# Altium PCB gps_imu.PcbDoc
Units mm, origin at the board's own origin, x right, y up, seen from the top; angles counter-clockwise.
Board outline 91.75 x 111 mm, 4 copper layers (Top Layer, GND, PWR, Bottom Layer), stack 0.778 mm thick; 42 components, 27 nets, 181 pads, 8 vias.
Unrouted connection lines stored in the file: 70.
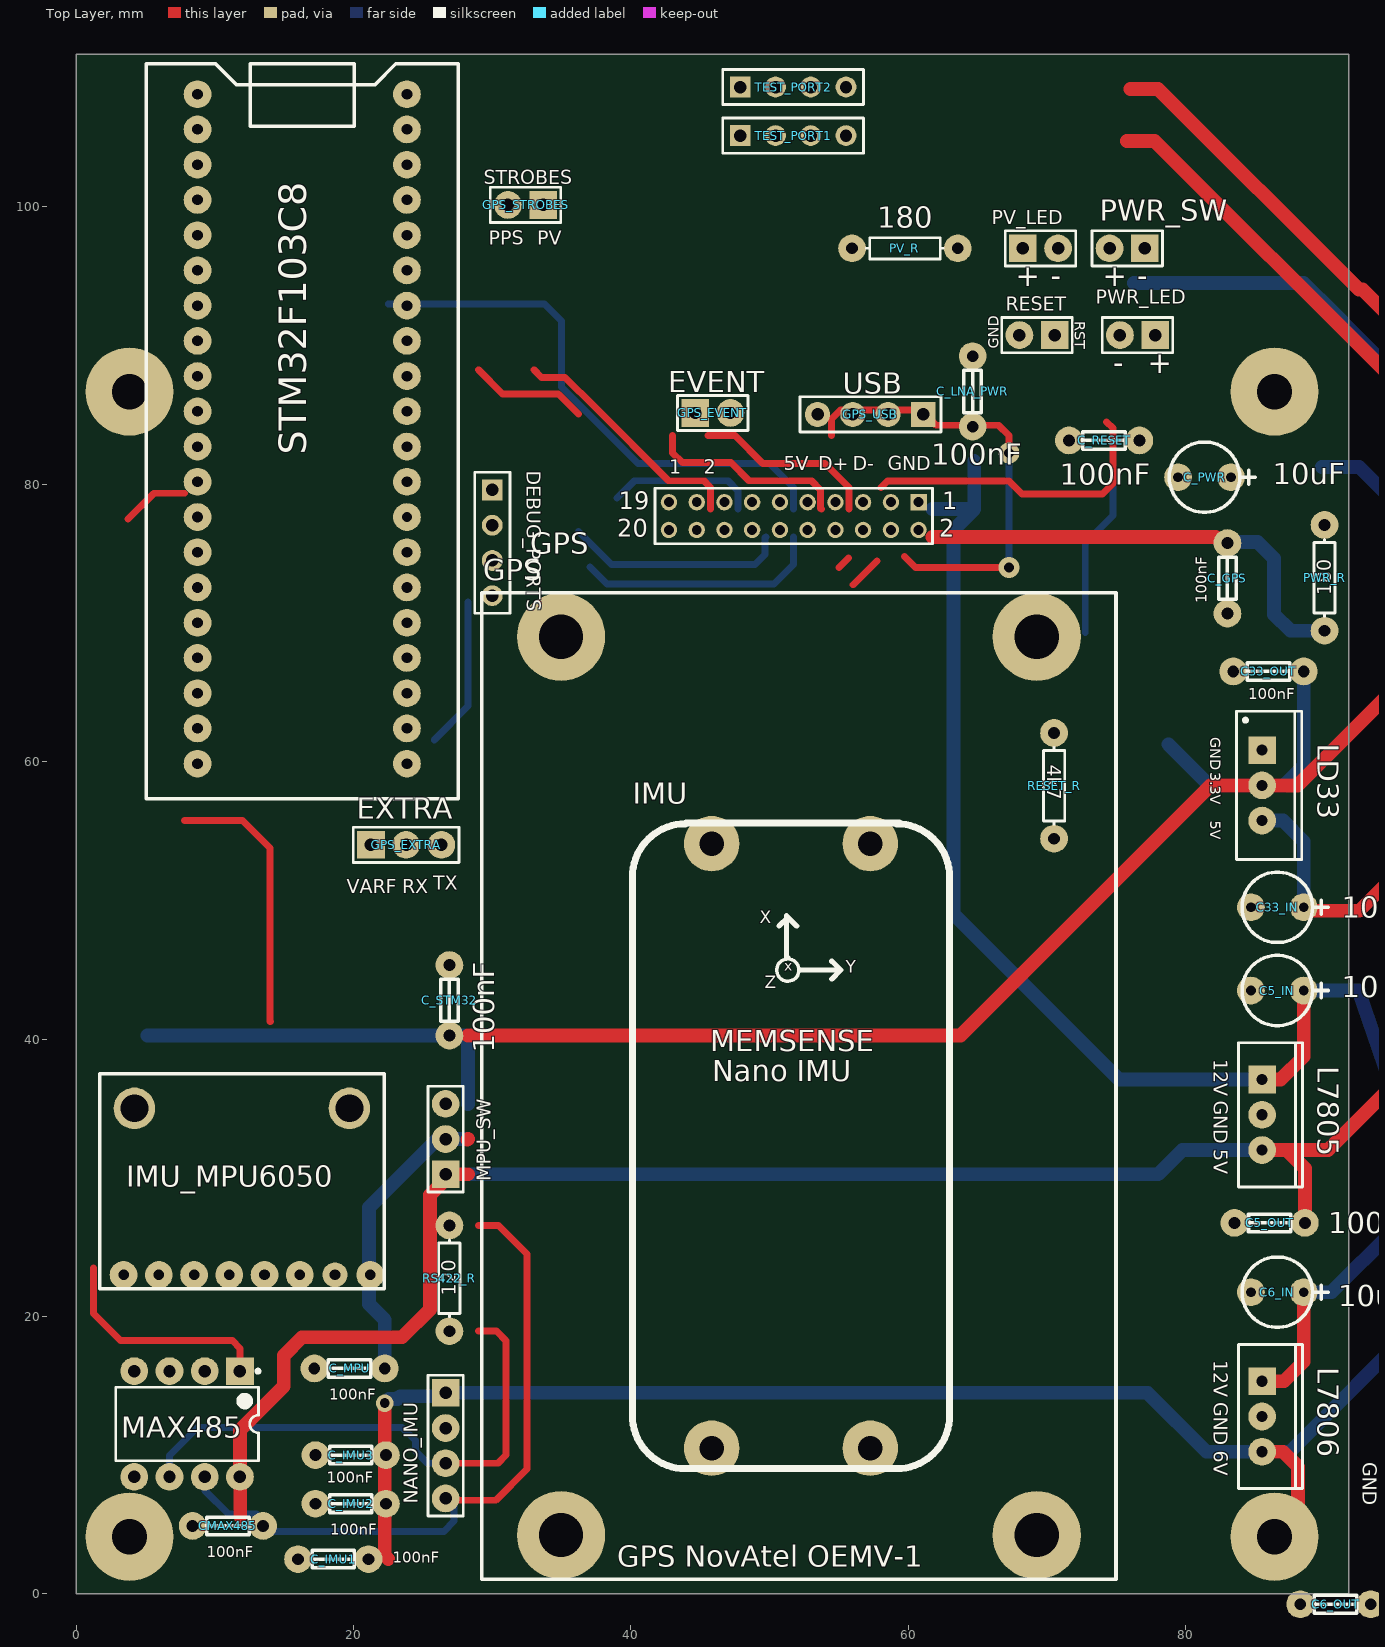
[diagram p0: Top Layer view]
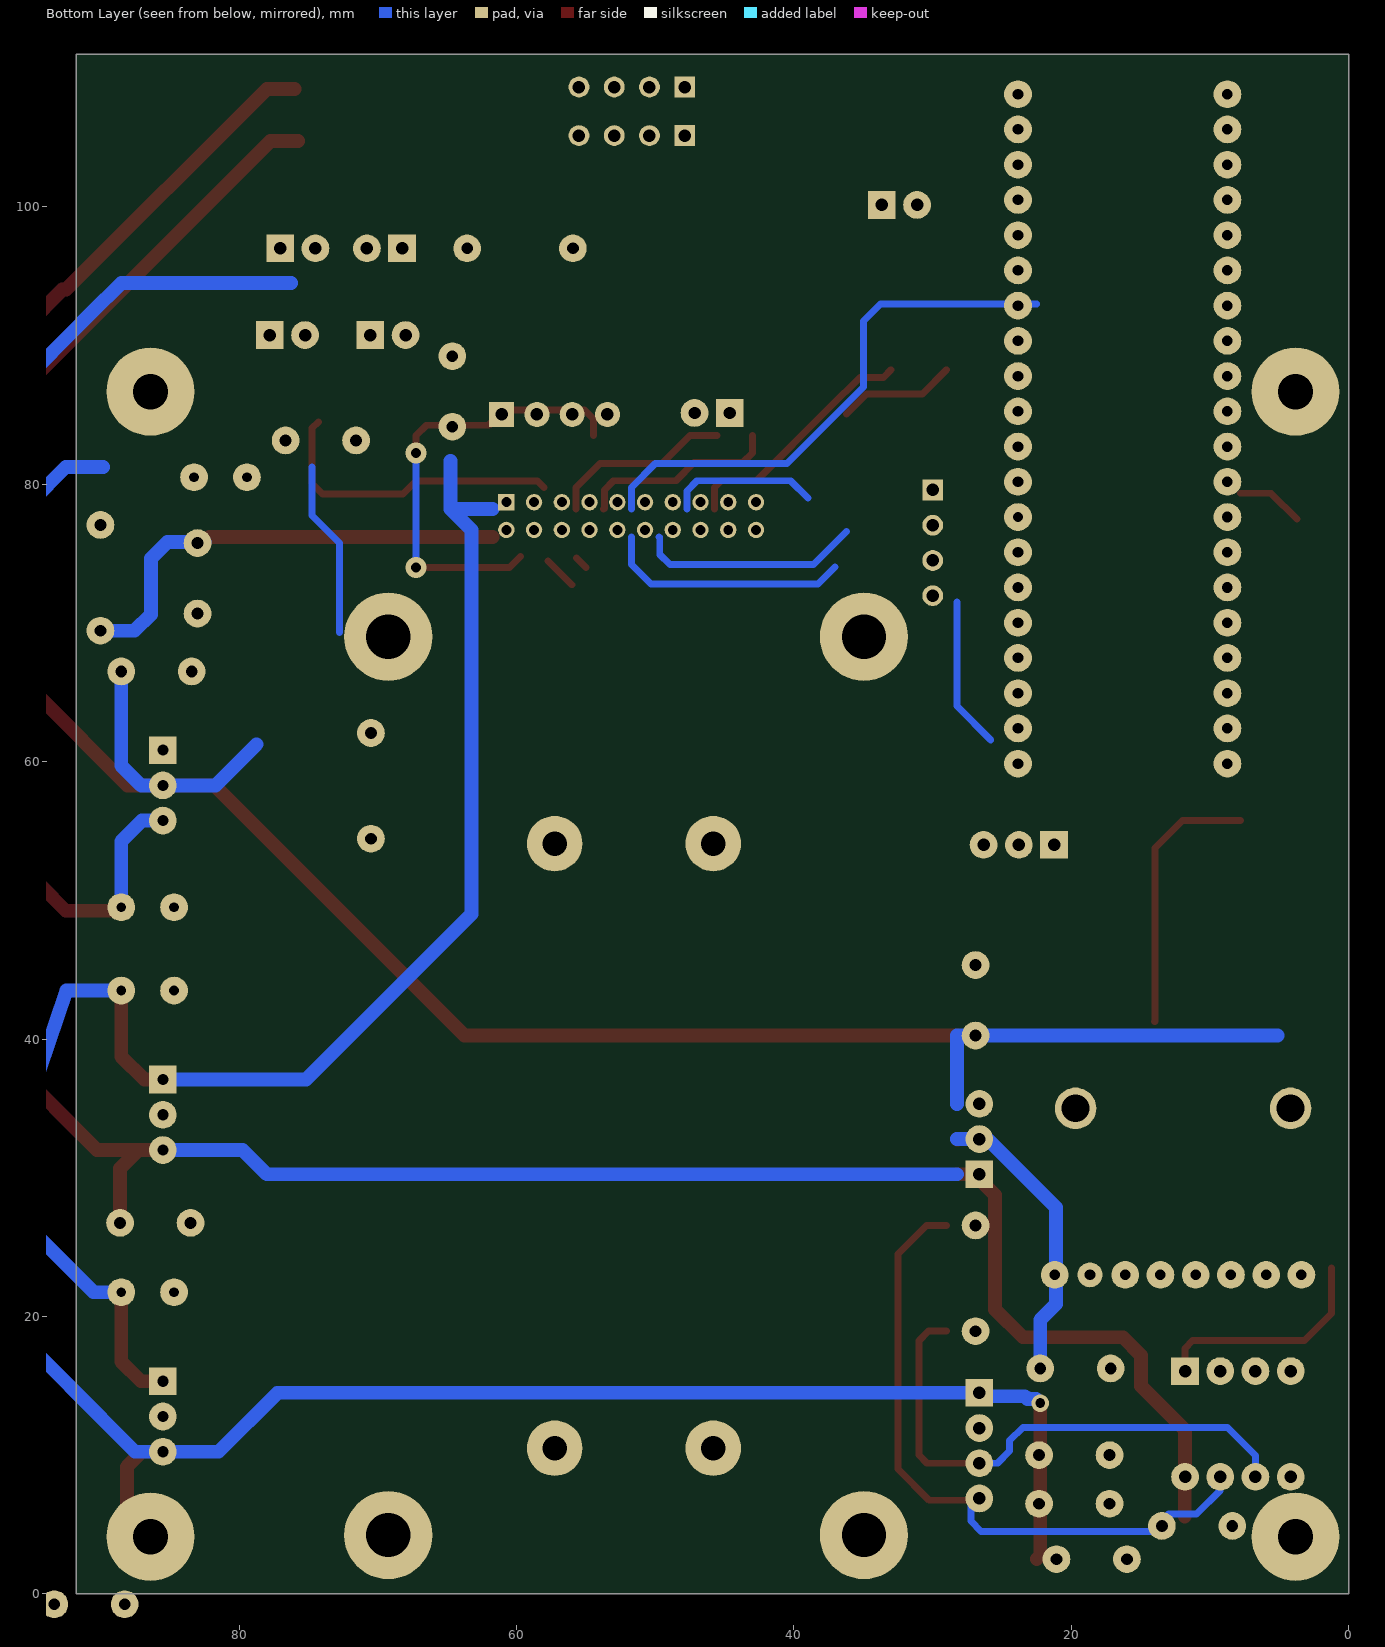
[diagram p1: Bottom Layer view, seen from below]
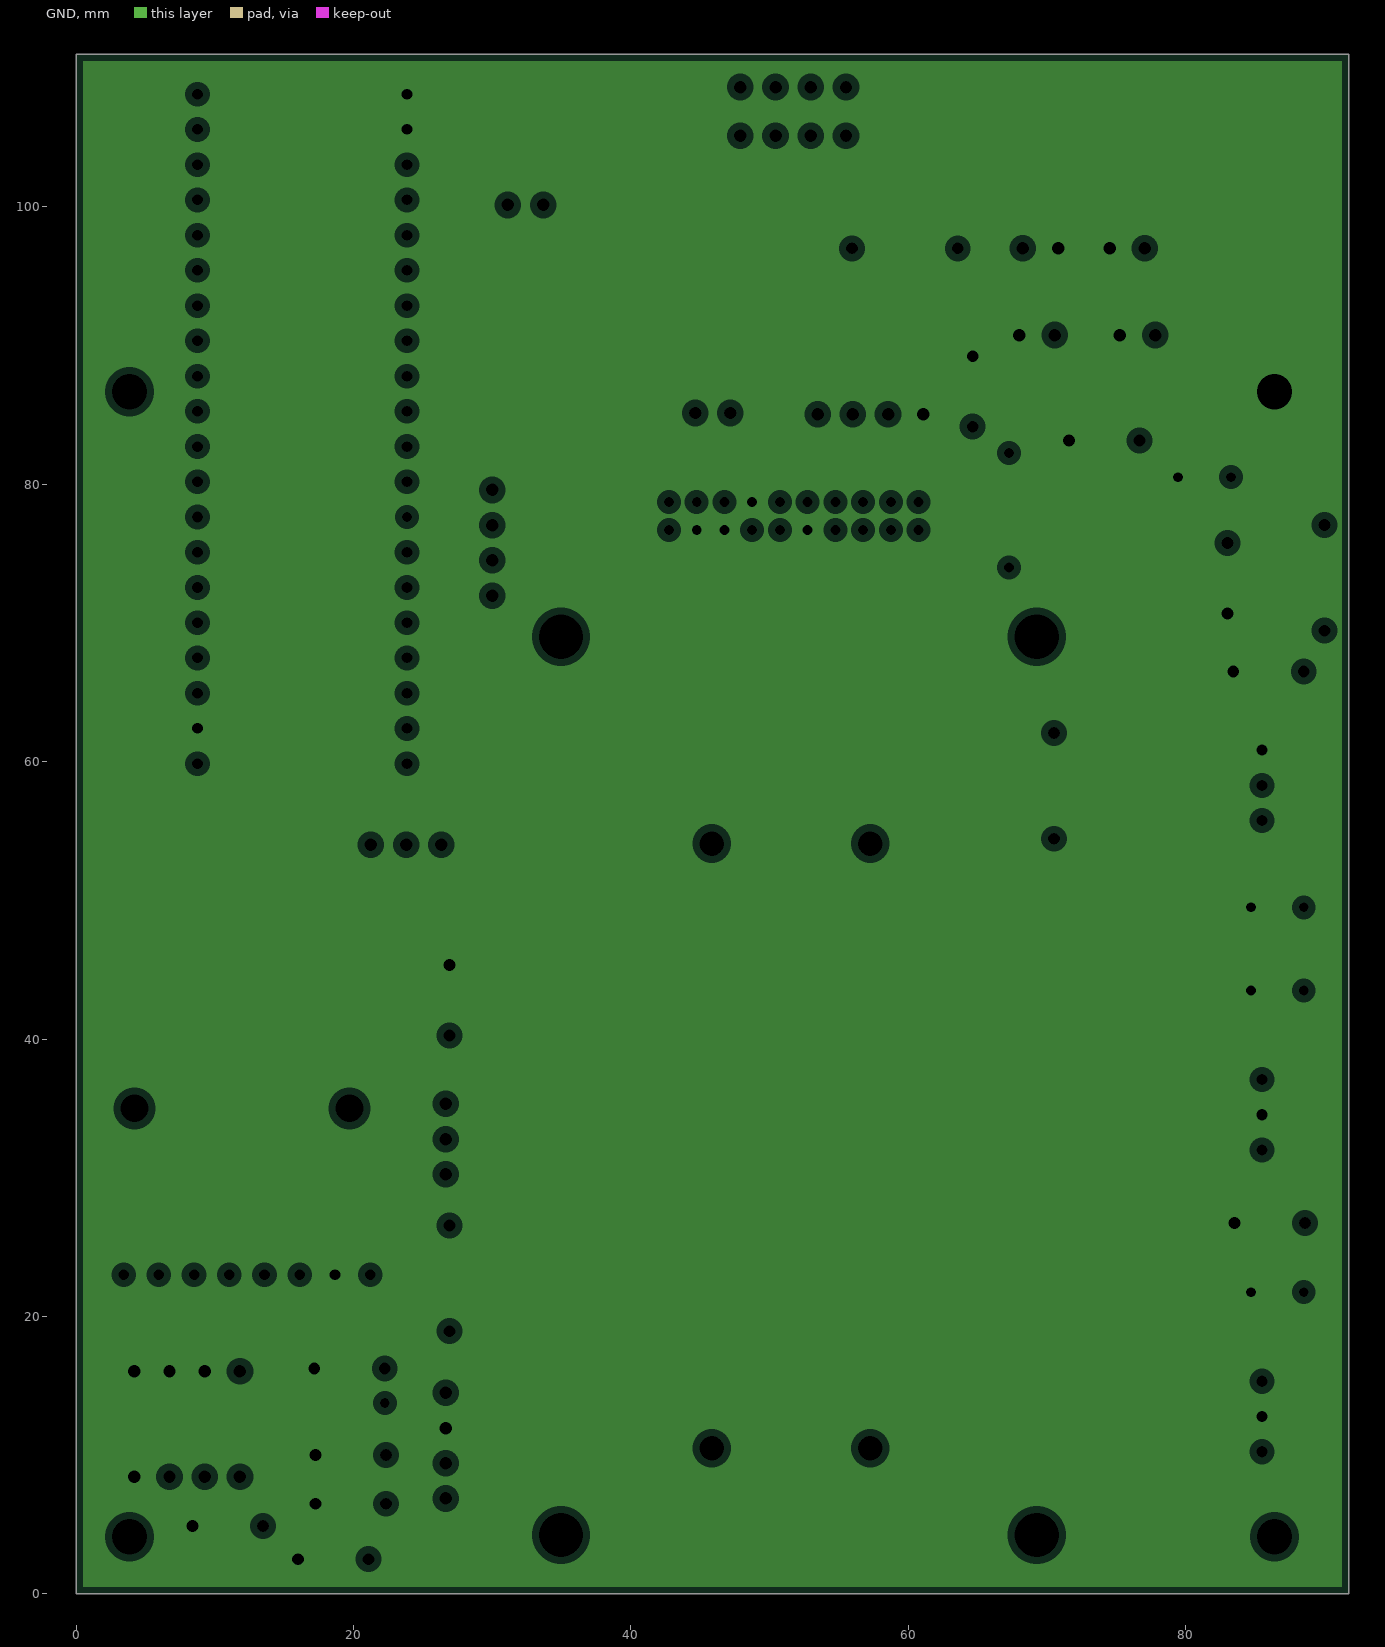
[diagram p2: GND, clearances drawn from the general rule]
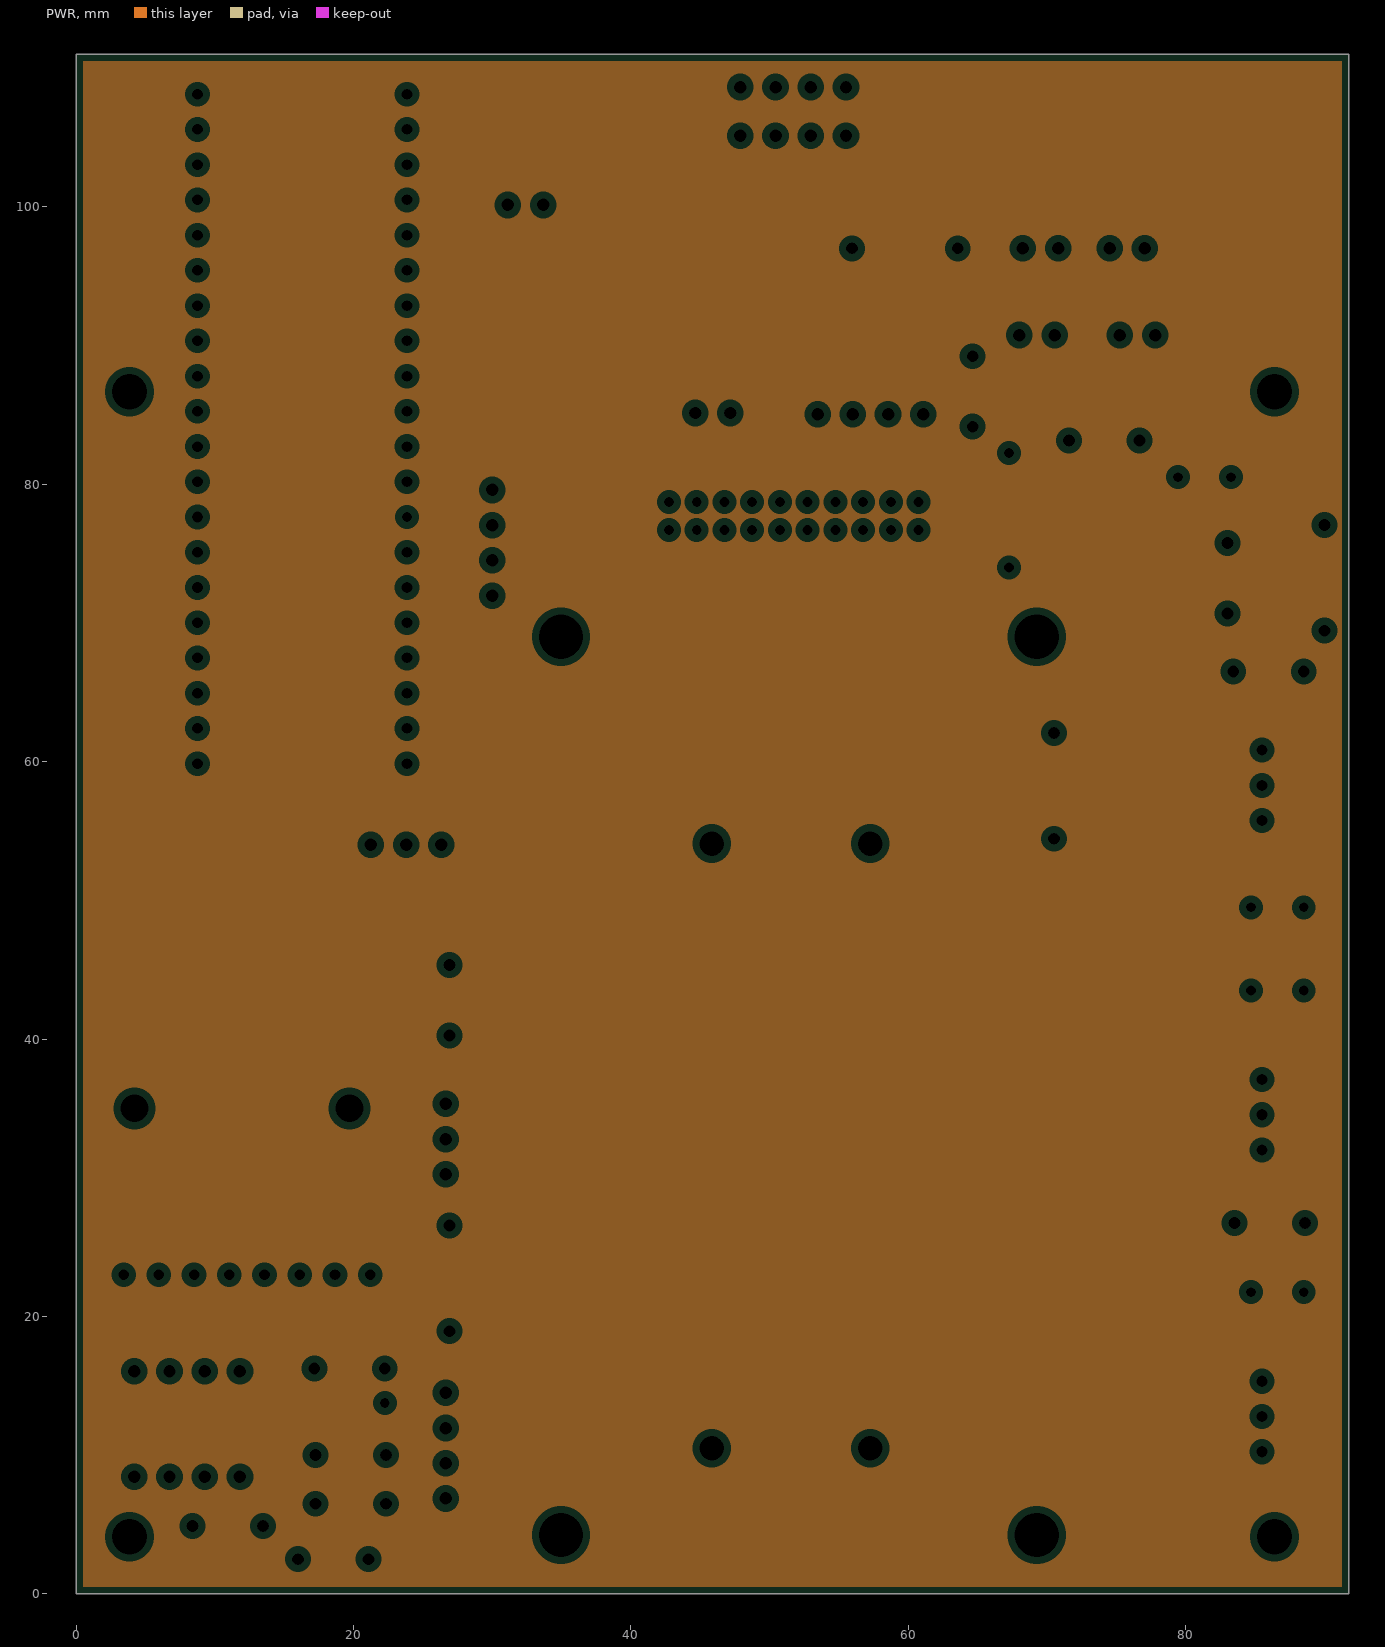
[diagram p3: PWR, clearances drawn from the general rule]

## Layer stack, top to bottom
Top Solder: solder mask 0.0102, Solder Resist, Dk 3.5
Top Layer: signal copper 0.0356
Dielectric 1: core 0.254, FR-4, Dk 4.2
GND: plane copper 0.036, net GND
Dielectric 3: prepreg 0.127, Dk 4.2
PWR: plane copper 0.036
Dielectric 2: core 0.254, Dk 4.2
Bottom Layer: signal copper 0.0356
Bottom Solder: solder mask 0.0102, Solder Resist, Dk 3.5

## Board outline
0,0 91.75,0 91.75,111 0,111

## Design rules (kind name [scope] priority, off if disabled: settings)
Clearance [All] p1: gap=0.7 ignorepadtopadclearanceinfootprint=TRUE
ComponentClearance [All] p1: gap=0.254 collisioncheckmode=3 verticalgap=2540 showdistances=FALSE
PlaneClearance [All] p1: clearance=0.508
PlaneConnect [All] p1: planeconnectstyle=Direct reliefexpansion=0.508 reliefentries=4 reliefconductorwidth=0.254 reliefairgap=0.254
PolygonConnect [All] p1: connectstyle=Direct reliefconductorwidth=0.254 reliefentries=4 polygonreliefangle="90 Angle" airgapwidth=0.254
RoomDefinition Sheet1 [InComponentClass('Sheet1')] p1: confinementstyle=ConfineOut formatcopy=TRUE lockcomponents=FALSE outline 114.25,16.75 558.249,16.75 558.249,97.75 114.25,97.75
RoutingVias [All] p1: holewidth=0.6 width=1.27 viastyle="Through Hole" minholewidth=0.6 minwidth=1.27 maxholewidth=2.8 maxwidth=2.8
ShortCircuit [All] p1: allowed=TRUE
SilkToSilkClearance [All] p1: silktosilkclearance=0
SolderMaskExpansion [All] p1: expansion=0.1
Width Width_Power [(InNet('3.3V') OR InNet('12V') OR InNet('6V') OR InNet('5V') OR InNet('GND') OR InNet('PWR_SW_2') OR InNet('MPU_VIN'))] p1: maxlimit=1 minlimit=1 preferedwidth=1
Width [All] p2: maxlimit=0.5 minlimit=0.5 preferedwidth=0.5
25 further rules are at their usual default settings.

## Classes and differential pairs
component class Sheet1: C5_IN C5_OUT C6_IN C6_OUT C33_IN C33_OUT C_GPS C_IMU1 C_IMU2 C_IMU3 C_LNA_PWR C_MPU C_PWR C_RESET C_STM32 CMAX485 DEBUG_PORTS GPS_EVENT GPS_EXTRA GPS_STROBES GPS_USB IMU_MPU6050 L7805 L7806 LD33 MAX485 MPU_SW NANO_IMU PV_LED PV_R PWR_LED PWR_R PWR_SW RESET RESET_R RS422_R STM32F103C8 TEST_PORT1 TEST_PORT2

## Components (designator, comment, footprint, x,y, rotation, side; value= is the part's Value field where it differs from the comment)
C5_IN "10uF" Capacitor1 88.5,43.496 r180 top
C5_OUT "100nF" C_NANO_HOLES 88.58,26.746 r180 top
C6_IN "10uF" Capacitor1 88.5,21.746 r180 top
C6_OUT "100nF" C_NANO_HOLES 93.33,-0.75 r180 top
C33_IN "10uF" Capacitor1 88.5,49.496 r180 top
C33_OUT "100nF" C_NANO_HOLES 88.5,66.496 r180 top
C_GPS "100nF" C_NANO_HOLES 83,70.67 r90 top
C_IMU1 "100nF" C_NANO_HOLES 16,2.5 r0 top
C_IMU2 "100nF" C_NANO_HOLES 17.25,6.5 r0 top
C_IMU3 "100nF" C_NANO_HOLES 17.25,10 r0 top
C_LNA_PWR "100nF" C_NANO_HOLES 64.631,89.224 r270 top
C_MPU "100nF" C_NANO_HOLES 17.17,16.25 r0 top
C_PWR "10uF" Capacitor1 83.25,80.5 r180 top
C_RESET "100nF" C_NANO_HOLES 71.568,83.148 r0 top
C_STM32 "100nF" C_NANO_HOLES 26.907,45.33 r270 top
CMAX485 "100nF" C_NANO_HOLES 8.398,4.898 r0 top
DEBUG_PORTS "DEBUG" HDR1X4#1 30,79.58 r270 top
GPS "Header 10X2" HDR2x10_2mm 42.735,76.701 r0 top
GPS "Comment" GPS_NOVATEL_OEMV1 52.105,36.615 r0 top
GPS_EVENT "EVENT" HDR1X2 44.63,85.13 r0 top
GPS_EXTRA "EXTRA" HDR1X3 21.25,54 r0 top
GPS_STROBES "STROBES" HDR1X2 33.67,100.126 r180 top
GPS_USB "USB" HDR1X4#2 61.07,85.026 r180 top
IMU "Comment" MEMSENSE_NANO_IMU 40.105,9.027 r0 top
IMU_MPU6050 "MPU6050" MPU6050 21.2,23 r90 top
L7805 "L7805ACV" TO220ABN 85.5,34.536 r270 top
L7806 "L7806CV" TO220ABN 85.5,12.786 r270 top
LD33 "LD33V" T03B 85.5,58.286 r270 top
MAX485 "MAX485CPA" PA8 8,12.246 r270 top
MPU_SW "Header 3" HDR1X3 26.639,30.246 r90 top
NANO_IMU "Header 4" HDR1X4#3 26.639,14.496 r270 top
PV_LED "PV" HDR1X2 68.25,97 r0 top
PV_R "180" AXIAL-0.3 59.75,97 r180 top
PWR_LED "PWR" HDR1X2 77.79,90.75 r180 top
PWR_R "180" AXIAL-0.3 90,73.246 r270 top
PWR_SW "Header 2" HDR1X2 77.04,97 r180 top
RESET "Header 2" HDR1X2 70.54,90.75 r180 top
RESET_R "4k7" AXIAL-0.3 70.5,58.25 r270 top
RS422_R "120" AXIAL-0.3 26.907,22.746 r90 top
STM32F103C8 "STM32F103C8 Blue Pill" STM32F103C8 5.05,57.31 r0 top
TEST_PORT1 "TEST1" HDR1X4#1 47.88,105.13 r0 top
TEST_PORT2 "TEST2" HDR1X4#1 47.88,108.63 r0 top

## Footprints (in the part's own frame and the unit in brackets; to place one, negate y for a bottom-side part, rotate by r counter-clockwise, add the part's x,y. Pads: shape width x height; smd on the part's side, far side on the other; paste and mask are expansions set on the pad)
AXIAL-0.3 [mm] "Axial Device, Thru-Hole; 2 Leads; 0.3 in Pin Spacing"
  round 2 hole 0.85: 1(-3.81,0) 2(3.81,0)
  silkscreen extent -2.77,-0.76 2.77,0.76
C_NANO_HOLES [mm] "C_NANO com furos maiores"
  round 2 hole 0.85: 1(0,0) 2(5.08,0)
  silkscreen extent 1.02,-0.63 4.06,0.64
Capacitor1 [mm]
  round 2 hole 0.711: 1(0,0) 2(3.81,0)
  silkscreen extent -1.76,-2.54 4.44,2.54
GPS_NOVATEL_OEMV1 [mm]
  round 6.35 hole 3.175: 0(17.145,32.385) 1(-17.145,32.385) 2(-17.145,-32.385) 3(17.145,-32.385)
  silkscreen extent -22.86,-35.56 22.86,35.56
HDR1X2 [mm] "Connector; Header; 2 Position"
  rect 2x2 hole 0.9: 1(0,0)
  round 2 hole 0.9: 2(2.54,0)
  silkscreen extent -1.27,-1.27 3.81,1.27
HDR1X3 [mm] "Connector; Header; 3 Position"
  rect 2x2 hole 0.9: 1(0,0)
  round 2 hole 0.9: 2(2.54,0) 3(5.08,0)
  silkscreen extent -1.27,-1.27 6.35,1.27
HDR1X4#1 [mm] "Connector; Header; 4 Position"
  rect 1.5x1.5 hole 0.9: 1(0,0)
  round 1.5 hole 0.9: 2(2.54,0) 3(5.08,0) 4(7.62,0)
  silkscreen extent -1.27,-1.27 8.89,1.27
HDR1X4#2 [mm] "Connector; Header; 4 Position"
  rect 1.8x1.8 hole 0.9: 1(0,0)
  round 1.8 hole 0.9: 2(2.54,0) 3(5.08,0) 4(7.62,0)
  silkscreen extent -1.27,-1.27 8.89,1.27
HDR1X4#3 [mm] "Connector; Header; 4 Position"
  rect 2x2 hole 0.9: 1(0,0)
  round 2 hole 0.9: 2(2.54,0) 3(5.08,0) 4(7.62,0)
  silkscreen extent -1.27,-1.27 8.89,1.27
HDR2x10_2mm [mm]
  rect 1.18x1.18 hole 0.71: 1(18,2)
  round 1.18 hole 0.71: 2(18,0) 3(16,2) 4(16,0) 5(14,2) 6(14,0) 7(12,2) 8(12,0) 9(10,2) 10(10,0) 11(8,2) 12(8,0) 13(6,2) 14(6,0) 15(4,2) 16(4,0) 17(2,2) 18(2,0) 19(0,2) 20(0,0)
  silkscreen extent -1,-1 19,3
MEMSENSE_NANO_IMU [mm]
  round 4 hole 1.778: 0(5.715,45.06) 1(17.145,45.06) 2(5.715,1.473) 3(17.145,1.473)
  silkscreen extent 0,0 22.86,46.53
MPU6050 [mm]
  round 2 hole 0.762: 0(0,0) 2(0,5.08) 3(0,7.62) 4(0,10.16) 5(0,12.7) 6(0,15.24) 7(0,17.78)
  round 1.8 hole 0.762: 1(0,2.54)
  round 3 hole 2: 9(12,1.5) 10(12,17)
  silkscreen extent -1,-1 14.5,19.5
PA8 [mm] "DIP, 8-Leads, Row Spacing 7.62mm, Pitch 2.54mm, Body 9.38x7.24mm"
  rect 2x2 hole 0.9: 1(-3.81,3.81)
  round 2 hole 0.9: 2(-3.81,1.27) 3(-3.81,-1.27) 4(-3.81,-3.81) 5(3.81,-3.81) 6(3.81,-1.27) 7(3.81,1.27) 8(3.81,3.81)
  silkscreen extent -3.93,-5.15 2.65,5.24, body extent -3.6,-5.15 3.6,5.15, height 4.58
STM32F103C8 [mm] "Blue Pill STM32F103C8"
  round 2 hole 0.762: 1(3.7,2.54) 2(3.7,5.08) 3(3.7,7.62) 4(3.7,10.16) 5(3.7,12.7) 6(3.7,15.24) 7(3.7,17.78) 8(3.7,20.32) 9(3.7,22.86) 10(3.7,25.4) 11(3.7,27.94) 12(3.7,30.48) 13(3.7,33.02) 14(3.7,35.56) 15(3.7,38.1) 16(3.7,40.64) 17(3.7,43.18) 18(3.7,45.72) 19(3.7,48.26) 20(3.7,50.8) 21(18.8,2.54) 22(18.8,5.08) 23(18.8,7.62) 24(18.8,10.16) 25(18.8,12.7) 26(18.8,15.24) 27(18.8,17.78) 29(18.8,22.86) 30(18.8,25.4) 31(18.8,27.94) 32(18.8,30.48) 33(18.8,33.02) 34(18.8,35.56) 35(18.8,38.1) 36(18.8,40.64) 37(18.8,43.18) 38(18.8,45.72) 39(18.8,48.26) 40(18.8,50.8)
  round 2 hole 0.711: 28(18.8,20.32)
  silkscreen extent 0,0 22.5,53
T03B [mm] "TO, Thru-Hole, Vertical, Heatsink Mounted; 3 In-Line Leads; Pitch 2.54 mm"
  rect 2x2 hole 0.8: 1(-2.54,0)
  round 2 hole 0.8: 2(0,0) 3(2.54,0)
  silkscreen extent -5.35,-1.85 5.35,2.85, body extent -5.4,-1.9 5.4,2.9, height 19.4
TO220ABN [mm] "TO, Thru-Hole, Vertical, Heatsink Mounted; 3 In-Line Leads; Pitch 2.54 mm; Pin sequence 1, 3, 2"
  rect 2x2 hole 0.8: 1(-2.54,0)
  round 2 hole 0.8: 2(2.54,0) 3(0,0)
  silkscreen extent -5.2,-1.7 5.2,2.9

## Part data
C5_IN C6_IN C33_IN C_PWR: library part "Cap Pol1", "Polarized Capacitor (Radial)", LatestRevisionDate=17-Jul-2002, LatestRevisionNote="Re-released for DXP Platform.", PackageDescription="Polarized Capacitor (Radial); 2 Leads", PackageReference=RB7.6-15, Published=8-Jun-2000, Publisher="Altium Limited"
C5_OUT C6_OUT C33_OUT C_GPS C_IMU1 C_IMU2 C_IMU3 C_LNA_PWR C_MPU C_RESET C_STM32 CMAX485: library part Cap, "Capacitor", LatestRevisionDate=17-Jul-2002, LatestRevisionNote="Re-released for DXP Platform.", PackageReference=RAD-0.3, Published=8-Jun-2000, Publisher="Altium Limited"
DEBUG_PORTS GPS_USB TEST_PORT1 TEST_PORT2: library part "Header 4", "Header, 4-Pin", LatestRevisionDate=17-Jul-2002, LatestRevisionNote="Re-released for DXP Platform.", Publisher="Altium Limited"
GPS: "Header, 10-Pin, Dual row", LatestRevisionDate=17-Jul-2002, LatestRevisionNote="Re-released for DXP Platform.", Publisher="Altium Limited"
GPS_EVENT GPS_STROBES: library part "Header 2", "Header, 2-Pin", LatestRevisionDate=17-Jul-2002, LatestRevisionNote="Re-released for DXP Platform.", Publisher="Altium Limited"
GPS_EXTRA: library part "Header 3", "Header, 3-Pin", LatestRevisionDate=17-Jul-2002, LatestRevisionNote="Re-released for DXP Platform.", Publisher="Altium Limited"
IMU_MPU6050: library part Component_1
L7805: "Precision 1A Regulator", ComponentLink1Description="Manufacturer Link", ComponentLink1URL=http://www.st.com/, ComponentLink2Description=Datasheet, ComponentLink2URL=http://www.st.com/stonline/products/literature/ds/2144/l7805ab.pdf, DatasheetVersion=Nov-1999, LatestRevisionDate=17-Jul-2002, LatestRevisionNote="Re-released for DXP Platform.", Note="Tab is connected to pin 3 (GND).", PackageDescription="TO, Thru-Hole, Vertical, Heatsink Mounted; 3 In-Line Leads; Pitch 2.54 mm; Pin sequence 1, 3, 2", PackageReference=TO220ABN, PackageVersion=Jun-1998, Published=24-Aug-2001, Publisher="Altium Limited"
L7806: "Positive Voltage Regulator", ComponentLink1Description="Manufacturer Link", ComponentLink1URL=http://www.st.com/, DatasheetVersion=Dec-1998, LatestRevisionDate=17-Jul-2002, LatestRevisionNote="Re-released for DXP Platform.", Note="Tab is connected to pin 3 (GND).", PackageDescription="TO, Thru-Hole, Vertical, Heatsink Mounted; 3 In-Line Leads; Pitch 2.54 mm; Pin sequence 1, 3, 2", PackageReference=TO220ABN, PackageVersion=Jun-1998, Published=24-Aug-2001, Publisher="Altium Limited"
LD33: library part LM1117T-3.3, "800mA Low-Dropout Linear Regulator", DigiKeyPartNumber=LM1117T-3.3-ND, Manufacturer="National Semiconductor", PackageTopMarking=NSUZXYTTE#*LM1117T*3.3, ComponentLink1Description="LM1117 Datasheet", ComponentLink1URL=http://www.national.com/ds/LM/LM1117.pdf, ComponentLink2Description="LM1117 Web Page", ComponentLink2URL=http://www.national.com/pf/LM/LM1117.html, ComponentLink3Description="T03B Package Page", ComponentLink3URL=http://www.national.com/packaging/folders/t03b.html, CompType="LDO IC", DatasheetVersion=Apr-2006, PackageDescription="TO-220, Molded, 3 Lead, Straight", PackageReference=T03B, PackageVersion="revL, Jan-1992", PartNumber=LM1117T-3.3, PinCount=3, Published=4-Dec-2008, Publisher="Altium Limited", RoHS=O
MAX485: "Low-Power, Slew-Rate-Limited RS-485/RS-422 Transceiver", Code_JEDEC=MS-001-AB, ComponentLink1Description="Manufacturer Link", ComponentLink1URL=http://www.maxim-ic.com/, ComponentLink2Description=Datasheet, ComponentLink2URL=http://pdfserv.maxim-ic.com/en/ds/MAX1487-MAX491.pdf, DatasheetVersion=Feb-1996, LatestRevisionDate=29-May-2009, LatestRevisionNote="Component Body Added.", PackageDescription="DIP, 8-Pin, Row Spacing 7.62 mm, Pitch 2.54 mm", PackageReference=PA8, PackageVersion="RevB, 21-0043", Published=16-Jan-2001, Publisher="Altium Limited"
MPU_SW: "Header, 3-Pin", LatestRevisionDate=17-Jul-2002, LatestRevisionNote="Re-released for DXP Platform.", Publisher="Altium Limited"
NANO_IMU: "Header, 4-Pin", LatestRevisionDate=17-Jul-2002, LatestRevisionNote="Re-released for DXP Platform.", Publisher="Altium Limited"
PV_LED PWR_LED: library part LED0, "Typical INFRARED GaAs LED", LatestRevisionDate=08-Jul-2005, LatestRevisionNote="Mech Layer 1 removed.", PackageReference=LED-0, Published=8-Jun-2000, Publisher="Altium Limited"
PV_R PWR_R RESET_R RS422_R: library part Res1, "Resistor", LatestRevisionDate=17-Jul-2002, LatestRevisionNote="Re-released for DXP Platform.", PackageReference=AXIAL-0.3, Published=8-Jun-2000, Publisher="Altium Limited"
PWR_SW RESET: "Header, 2-Pin", LatestRevisionDate=17-Jul-2002, LatestRevisionNote="Re-released for DXP Platform.", Publisher="Altium Limited"
STM32F103C8: library part STM32F103C8

## Free pads (board coordinates)
  round 6.35 hole 2.54: 0(-13.338,-97.466) 0(3.844,86.668) 1(69.212,-97.466) 1(86.394,86.668) 2(69.212,-180.016) 2(86.394,4.118) 3(-13.338,-180.016) 3(3.844,4.118)

## Via types
v1: diameter 1.5, hole 0.711, Top Layer to Bottom Layer, 7 vias
v2: diameter 1.27, hole 0.711, Top Layer to Bottom Layer, 1 vias

## Nets (pads, with @x,y where several pads share a name; then routed paths per layer and width w, separated by ;. In a path a pad name is that pad's centre, name@x,y a point inside that pad or via, vN(x,y) a via of type N, cw(c..) or ccw(c..) an arc to the next point about the centre after c; other vN are vias at no path point)
3.3V: C33_OUT.1 C_GPS.2 C_STM32.2 GPS.2@60.735,76.701 LD33.2 MPU_SW.3 PWR_R.2 RESET_R.2 STM32F103C8.1 TEST_PORT1.4 TEST_PORT2.4 | length 205.1
  Top Layer w1: 28.25,40.25 63.754,40.25 81.79,58.286 LD33.2 88.04,58.286 94.49,64.736 94.49,88.006 77.746,104.75 75.75,104.75 ; 61.726,76.202 82.124,76.202 C_GPS.2@82.5,75.826
  Bottom Layer w1: 5.15,40.25 28.25,40.25 28.25,35.326 ; 78.75,61.246 81.71,58.286 LD33.2 87.06,58.286 88.5,59.726 C33_OUT.1 ; C_GPS.2@82.5,75.826 85.17,75.826 86.361,74.635 86.361,70.607 87.532,69.436 PWR_R.2
5V: C5_OUT.1 C33_IN.1 CMAX485.2 GPS_USB.4 L7805.2 LD33.3 MAX485.8 MPU_SW.1 TEST_PORT1.3 TEST_PORT2.3 | length 212
  Top Layer w1: 11.83,5.576 11.83,8.416 MAX485.8 11.81,11.81 14.97,14.97 14.97,17.191 16.279,18.5 23.5,18.5 25.5,20.5 25.5,28.75 26.996,30.246 28.25,30.246 ; 76,108.5 77.996,108.5 92.47,94.026 92.724,94.026 95.28,91.47 95.28,91.216 96.5,89.996 96.5,53.246 96,52.746 ; L7805.2 87.25,31.996 ; C33_IN.1 88.75,49.246 92.5,49.246 96,52.746 ; C5_OUT.1 88.58,30.666 87.25,31.996 ; 87.25,31.996 90.25,31.996 96.5,38.246 96.5,52.746 96,52.746
  Bottom Layer w1: 28.25,30.246 78,30.246 79.75,31.996 L7805.2 ; LD33.3 87,55.746 88.5,54.246 C33_IN.1
6V: C6_OUT.1 C_IMU1.2 C_IMU2.2 C_IMU3.2 L7806.2 NANO_IMU.1 pad.2@86.394,4.118 TEST_PORT1.2 TEST_PORT2.2 | length 189.3
  Top Layer w1: v2(22.25,13.75) 22.25,2.75 22.5,2.5 ; L7806.2 87,10.246 88.08,9.166 pad.2@88.08,5.496
  Bottom Layer w1: v2(22.25,13.75) 22.55,14.05 23.161,14.05 23.361,14.25 26.393,14.25 NANO_IMU.1 77.25,14.496 81.5,10.246 L7806.2 87.5,10.246 97,19.746 97,85.996 92.248,90.748 90.67,92.326 88.496,94.5 76.25,94.5
12V: C5_IN.1 C6_IN.1 C_LNA_PWR.2 C_PWR.1 GPS.1@60.735,78.701 L7805.1 L7806.1 PWR_SW.1 TEST_PORT1.1 TEST_PORT2.1 | length 159.4
  Top Layer w1: L7806.1 87.08,15.326 88.5,16.746 C6_IN.1 ; L7805.1 86.83,37.076 88.5,38.746 C5_IN.1
  Bottom Layer w1: 61.726,78.202 64.75,78.202 ; 64.75,81.666 64.75,78.202 ; L7805.1 75.17,37.076 63.25,48.996 63.25,76.702 64.75,78.202 ; C6_IN.1 90.5,21.746 95,26.246 95,36.058 ; C5_IN.1 92.438,43.496 95,36.058 ; 89.81,81.246 92.5,81.246 95,78.746 95,36.058
GND: C5_IN.2 C5_OUT.2 C6_IN.2 C6_OUT.2 C33_IN.2 C33_OUT.2 C_GPS.1 C_IMU1.1 C_IMU2.1 C_IMU3.1 C_LNA_PWR.1 C_MPU.1 C_PWR.2 C_RESET.1 C_STM32.1 CMAX485.1 GPS.10 GPS.13 GPS.16 GPS.18 GPS_USB.1 IMU_MPU6050.1 L7805.3 L7806.3 LD33.1 MAX485.2 MAX485.3 MAX485.4 MAX485.5 NANO_IMU.2 pad.1@86.394,86.668 PV_LED.2 PWR_LED.2 PWR_SW.2 RESET.2 STM32F103C8.2 STM32F103C8.39 STM32F103C8.40
  other v1: 96,4.246 96,6.746 96,9.246 96,11.746 96,14.246
GPS_CAN2_RX: GPS.8 GPS_EXTRA.2 | length 1
  Top Layer w0.5: 55,73.996 55.676,74.672
GPS_CAN2_TX: GPS.20 GPS_EXTRA.3
GPS_COM1_RX: DEBUG_PORTS.3 GPS.12 STM32F103C8.28 | length 17.8
  Bottom Layer w0.5: 37.044,74.036 38.283,72.796 50.3,72.796 51.726,74.222 51.726,76.202
GPS_COM1_TX: DEBUG_PORTS.4 GPS.11 STM32F103C8.27 | length 50
  Bottom Layer w0.5: 22.5,93 33.75,93 35,91.75 35,86.996 39.75,82.246 40.5,81.496 50,81.496 51.726,79.77 51.726,78.202 ; 25.816,61.562 28.25,63.996 28.25,71.496
GPS_COM2_RX: DEBUG_PORTS.1 GPS.15 STM32F103C8.36 | length 10.9
  Bottom Layer w0.5: 39,78.996 40.25,80.246 47,80.246 47.726,79.52 47.726,78.202
GPS_COM2_TX: DEBUG_PORTS.2 GPS.14 STM32F103C8.35 | length 16.1
  Bottom Layer w0.5: 36.201,76.576 38.583,74.193 48.947,74.193 49.676,74.922 49.676,76.152 49.726,76.202
GPS_Event1: GPS.9 GPS_EVENT.1 | length 14.4
  Top Layer w0.5: 43,83.5 43,82.25 43.7,81.55 47.196,81.55 48.5,80.246 53,80.246 53.676,79.57 53.676,78.252 53.726,78.202
GPS_Event2: GPS.7 GPS_EVENT.2 | length 13.3
  Top Layer w0.5: 45.54,83.5 47.5,83.5 49.5,81.5 54,81.5 55.726,79.774 55.726,78.202
GPS_PPS: GPS.19 GPS_STROBES.2 | length 8.5
  Top Layer w0.5: 29,88.246 30.75,86.496 34.758,86.496 36.2,85.054 36.2,85.05
GPS_PV: GPS.17 GPS_STROBES.1 PV_R.2 | length 17.8
  Top Layer w0.5: 33,88.246 33.55,87.696 35.255,87.696 37.4,85.551 37.4,85.547 42.701,80.246 45.254,80.246 45.726,79.774 45.726,78.202
GPS_RESETIN: C_RESET.2 GPS.5 RESET.1 RESET_R.1 | length 35
  Top Layer w0.5: 58.026,79.772 58.493,80.239 67.257,80.239 68.2,79.296 74,79.296 74.75,80.046 74.75,84.036 74.29,84.496
  Bottom Layer w0.5: 72.75,69.31 72.75,75.746 74.75,77.746 74.75,81.25
GPS_USB_D+: GPS.4 GPS_USB.3 | length 32
  Top Layer w0.5: 54.46,83.496 54.46,84.71 55.096,85.346 60.904,85.346 62.004,84.246 66.504,84.246 67.25,83.5 v1(67.25,82.25) ; 59.726,74.77 60.496,74 v1@67,74
  Bottom Layer w0.5: v1@67,74 67.25,74.25 v1@67.25,82
  other v1: 67.25,74
GPS_USB_D-: GPS.3@58.735,78.701 GPS_USB.2
GPS_VARF: GPS.6 GPS_EXTRA.1 | length 2.4
  Top Layer w0.5: 56,72.746 57.726,74.472
IMU_HRS_A: MAX485.6 NANO_IMU.3 RS422_R.1 | length 38.9
  Top Layer w0.5: NANO_IMU.3@27.25,9.416 30.42,9.416 31,9.996 31,18.246 30.31,18.936 29,18.936
  Bottom Layer w0.5: MAX485.6 6.73,9.976 8.754,12 23.5,12 24.45,11.05 24.45,10.296 25.33,9.416 NANO_IMU.3 NANO_IMU.3@27.25,9.416
IMU_HRS_B: MAX485.7 NANO_IMU.4 RS422_R.2 | length 49
  Top Layer w0.5: NANO_IMU.4@27.25,6.876 27.38,6.746 30.25,6.746 32.5,8.996 32.5,24.496 30.44,26.556 29,26.556
  Bottom Layer w0.5: MAX485.7@9.81,7.896 MAX485.7 9.27,7.464 10.984,5.75 13,5.75 14.25,4.5 26.504,4.5 27.25,5.246 NANO_IMU.4@27.25,6.876
IMU_TX: MAX485.1 STM32F103C8.14 | length 21.4
  Top Layer w0.5: 1.25,23.5 1.25,20.205 3.205,18.25 11.261,18.25 11.81,17.701 MAX485.1 ; 3.75,77.496 5.596,79.342 7.801,79.342
MPU_VIN: C_MPU.2 IMU_MPU6050.0 MPU_SW.2 | length 21.3
  Top Layer w1: 28.199,32.735 28.25,32.786
  Bottom Layer w1: C_MPU.2 22.25,19.743 21.101,20.892 21.101,27.851 26.036,32.786 MPU_SW.2 28.25,32.786
NetPV_LED_1: PV_LED.1 PV_R.1
NetPWR_LED_1: PWR_LED.1 PWR_R.1
SCL_MPU6050: IMU_MPU6050.2 STM32F103C8.7
SDA_MPU6050: IMU_MPU6050.3 STM32F103C8.6 | length 19.5
  Top Layer w0.5: 7.801,55.752 11.998,55.752 13.987,53.763 13.987,41.251 14,41.251
pads on no net: GPS.0 GPS.1@34.96,69 GPS.2@34.96,4.23 GPS.3@69.25,4.23 IMU.0 IMU.1 IMU.2 IMU.3 IMU_MPU6050.4 IMU_MPU6050.5 IMU_MPU6050.6 IMU_MPU6050.7 IMU_MPU6050.9 IMU_MPU6050.10 STM32F103C8.3 STM32F103C8.4 STM32F103C8.5 STM32F103C8.8 STM32F103C8.9 STM32F103C8.10 STM32F103C8.11 STM32F103C8.12 STM32F103C8.13 STM32F103C8.15 STM32F103C8.16 STM32F103C8.17 STM32F103C8.18 STM32F103C8.19 STM32F103C8.20 STM32F103C8.21 STM32F103C8.22 STM32F103C8.23 STM32F103C8.24 STM32F103C8.25 STM32F103C8.26 STM32F103C8.29 STM32F103C8.30 STM32F103C8.31 STM32F103C8.32 STM32F103C8.33 STM32F103C8.34 STM32F103C8.37 STM32F103C8.38

## Polygon pours and split planes (outlines as drawn)
GND on GND (split plane): 91.24,0.51 0.51,0.51 0.51,110.49 91.24,110.49
no net on PWR (split plane): 91.24,0.51 0.51,0.51 0.51,110.49 91.24,110.49

## Silkscreen, mask and mechanical layers (free items; w line width, h text height)
Top Overlay:
  text "PPS" at 29.75,97.25 h1
  text "PV" at 33.25,97.25 h1
  text "+" at 67.75,94.25 h1.52
  text "-" at 70.25,94.25 h1.52
  text "+" at 74,94.25 h1.52
  text "-" at 76.5,94.25 h1.52
  text "RST" at 72,91.75 h0.75 r270
  text "GND" at 66.5,89.75 h0.75 r90
  text "-" at 74.75,88 h1.52
  text "+" at 77.25,88 h1.52
  text "5V" at 51,80.996 h1
  text "D+" at 53.5,80.996 h1
  text "D-" at 56,80.996 h1
  text "GND" at 58.5,80.996 h1
  text "1" at 42.75,80.75 h1
  text "2" at 45.25,80.75 h1
  text "GND" at 81.75,61.746 h0.75 r270
  text "3.3V" at 81.75,59.246 h0.75 r270
  text "5V" at 81.75,55.746 h0.75 r270
  text "TX" at 25.75,50.75 h1
  text "VARF" at 19.5,50.5 h1
  text "RX" at 23.5,50.5 h1
  text "GND" at 92.75,9.496 h1 r270
Bottom Overlay:
  drawing of 1231 lines, arcs and shapes, not listed
  text "GPS/IMU Board v1.5" at 213.74,75.276 h1.4
  text "Gabriel Araujo" at 211.53,72.736 h1.27
  text "Sistema de localizacao por GPS/UMI" at 224.078,67.656 h1.27
  text "para robos moveis em ambiente externo" at 223.951,65.065 h1.27

## Text inside footprints (layer, text, board x,y; h text height)
GPS: Top Overlay "GPS NovAtel OEMV-1" at 39.024,1.944 h1.52
GPS: Top Overlay "20" at 39.023,76.201 h1.27; Top Overlay "19" at 39.129,78.201 h1.27; Top Overlay "1" at 62.447,78.201 h1.27; Top Overlay "2" at 62.235,76.201 h1.27
IMU: Top Overlay "Nano IMU" at 45.847,36.967 h1.52; Top Overlay "MEMSENSE" at 45.718,39.126 h1.52; Top Overlay "x" at 51.052,44.663 h1.27; Top Overlay "X" at 49.274,48.016 h1.52; Top Overlay "Y" at 55.497,44.46 h1.52; Top Overlay "Z" at 49.655,43.317 h1.52
L7805: Top Overlay "12V" at 82,38.536 h1 r270; Top Overlay "5V" at 82,32.036 h1 r270; Top Overlay "GND" at 82,35.536 h1 r270
L7806: Top Overlay "12V" at 82,16.826 h1 r270; Top Overlay "6V" at 82,10.326 h1 r270; Top Overlay "GND" at 82,13.826 h1 r270